# EAGLE board X15_Power_Plate (EAGLE 9.6.2)
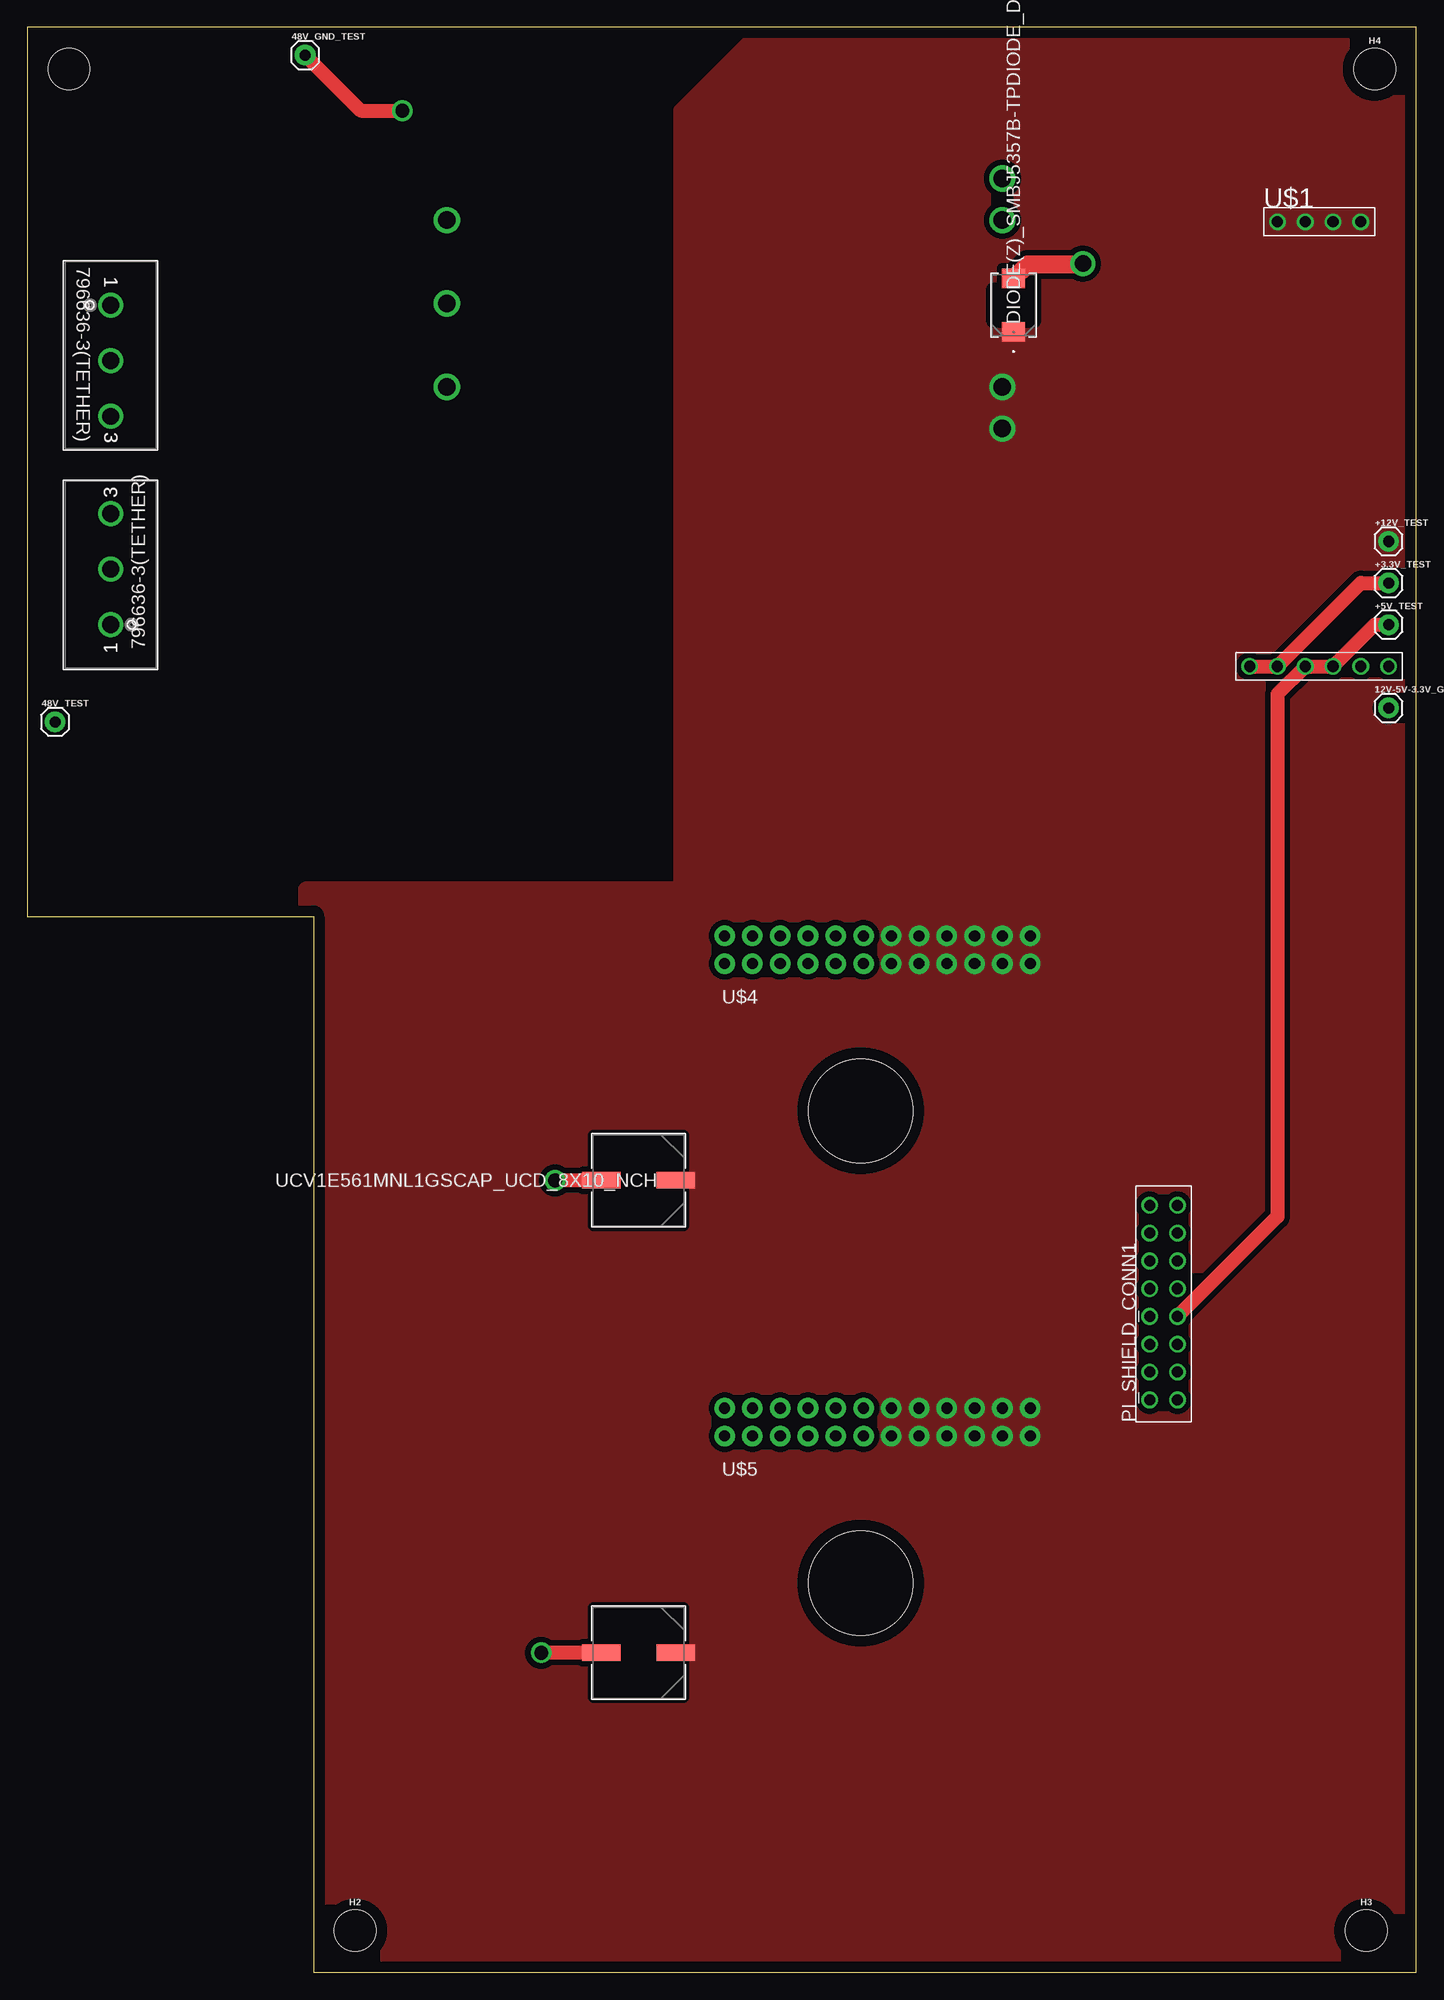
[diagram p0: board, top side]
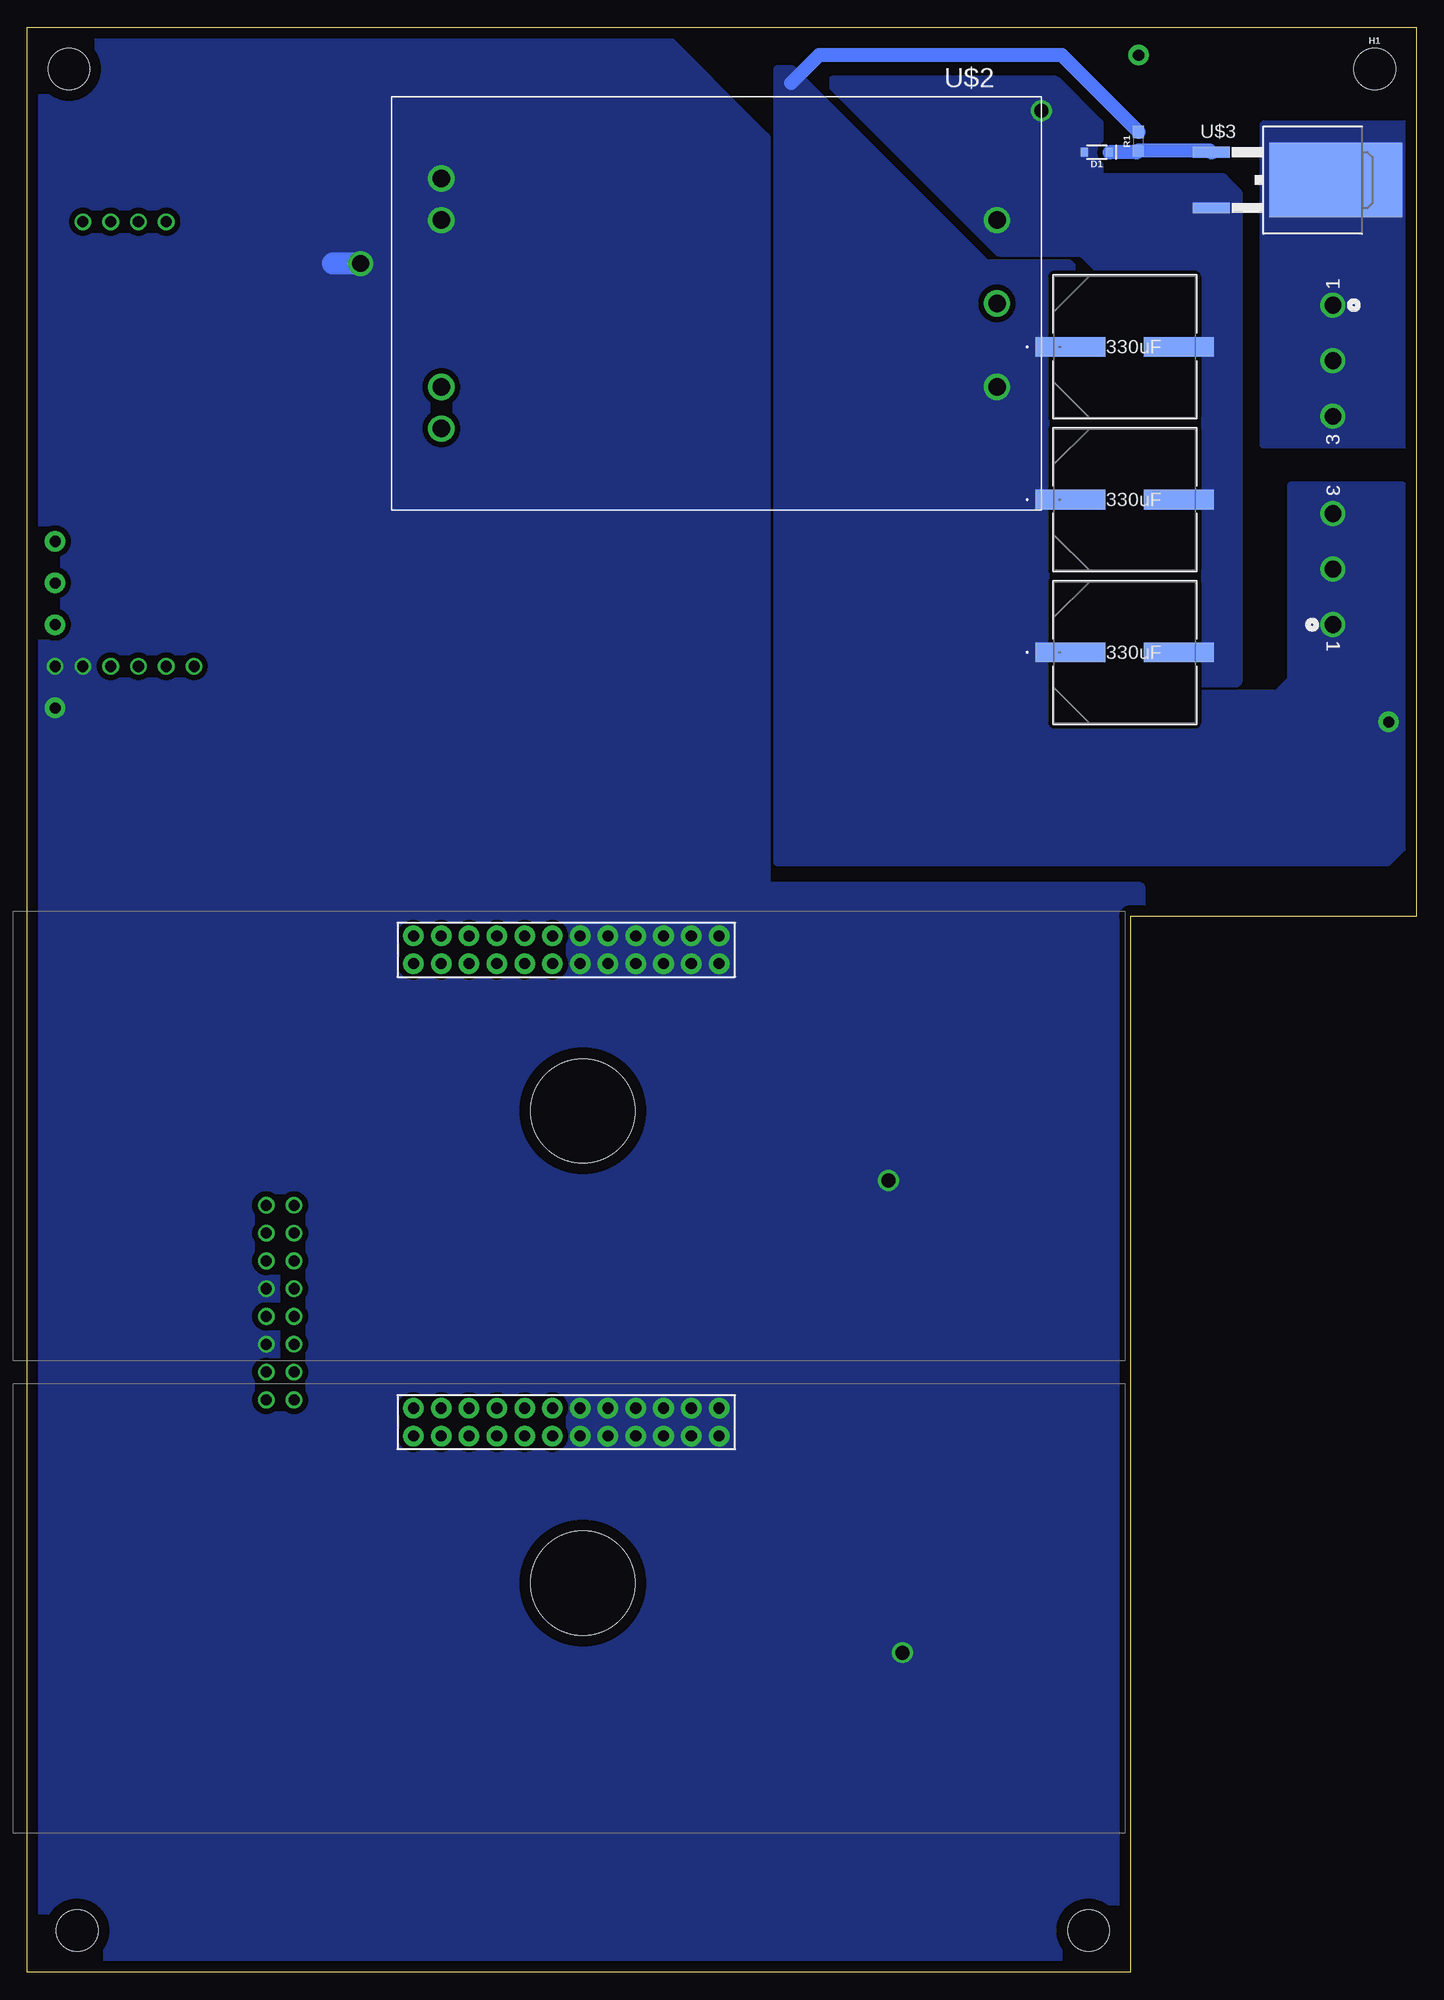
[diagram p1: board, bottom side, seen from below]

Size 127 x 177.8 mm. Coordinates in mm from the lower left corner, seen from the top.
Outline: 26.16,0 127,0 127,177.8 0,177.8 0,96.52 26.16,96.52 26.16,0
Copper layers (1*16): Top 0.035mm / dielectric 1.5mm / Bottom 0.035mm
Design rules "477": minimum track width 6mil, minimum drill 0.35mm, track to track 6mil, track to pad 6mil, pad to pad 6mil, via to via 6mil, smd to smd 6mil, copper to edge 40mil, drill to drill 6mil, minimum pad ring 10mil, minimum via ring 8mil, stop-mask expansion 4mil, vias tented up to drill 0mil, thermal gap 10mil
Holes 9.53 mm at 76.2,35.56 76.2,78.74

## Footprints (pad centres in the part's own frame; a part is rotated, then mirrored left to right if it is on the bottom)
1X01 = drill 1.016 pad 1.88: 1 0,0
CAP_099112E3_VIS-M = smd 6.401 x 1.803: 1 -4.966,0; 2 4.966,0
CAP_UCD_8X10_NCH = smd 3.505 x 1.499: 1 -3.404,0; 2 3.404,0
DIODE_DO-214AA_4P38X3P62_MCC-M = smd 1.803 x 2.108: 1 -2.451,0; 2 2.451,0
SOD-323 = smd 0.63 x 0.83: A 1.15,0; C -1.15,0
6-32-HOLE = hole 3.81: 0,0
IPL7X2 = drill 1.016 pad 1.524: 1 2.032,3.81; 2 2.032,1.27; 3 4.572,3.81; 4 4.572,1.27; 5 7.112,3.81; 6 7.112,1.27; 7 9.652,3.81; 8 9.652,1.27; 9 12.192,3.81; 10 12.192,1.27; 11 14.732,3.81; 12 14.732,1.27; 13 17.272,3.81; 14 17.272,1.27; 15 19.812,3.81; 16 19.812,1.27
0603 = smd 1.1 x 1: 1 -0.85,0; 2 0.85,0
CON3_P5MM_VER_TERM-BLK_TYC = drill 1.524 pad 2.032: 1 0,0; 2 5.08,0; 3 10.16,0
TSW-105-05-G-S(D-C) = drill 1.016: 1 -3.81,20.32; 2 -1.27,20.32; 3 1.27,20.32; 4 3.81,20.32; 5 -6.35,-20.32; 6 -3.81,-20.32; 7 -1.27,-20.32; 8 1.27,-20.32; 9 3.81,-20.32; 10 6.35,-20.32
BMR480_CONNECTOR = drill 1.6 pad 2: PIN1 4.06,26.52; PIN2 4.06,18.9; PIN3 4.06,11.28; PIN4 54.86,7.47; PIN5 54.86,11.28; PIN7 54.86,26.52; PIN8 54.86,30.33
D2PAK = smd 3.4 x 1: 1 -6.552,2.54; 2 -6.552,-2.54 | smd 12.14 x 6.8: 3 4.818,0
BACKPLANE_ESC_ADAPTER_BKP_PWR = drill 1.016 pad 1.88: 12V@1 65.024,36.322; 12V@2 65.024,38.862; 12V@3 62.484,36.322; 12V@4 62.484,38.862; 12V@5 59.944,36.322; 12V@6 59.944,38.862; 12V@7 57.404,36.322; 12V@8 57.404,38.862; 12V@9 54.864,36.322; 12V@10 54.864,38.862; 12V@11 52.324,36.322; 12V@12 52.324,38.862; GND@1 49.784,38.862; GND@2 49.784,36.322; GND@3 47.244,38.862; GND@4 47.244,36.322; GND@5 44.704,38.862; GND@6 44.704,36.322; GND@7 42.164,38.862; GND@8 42.164,36.322; GND@9 39.624,38.862; GND@10 39.624,36.322; GND@11 37.084,38.862; GND@12 37.084,36.322

## Placement (x,y rotation side)
12V-5V-3.3V_GND  [1X01]  124.46,115.57 0 top
48V_GND_TEST  [1X01]  25.4,175.26 0 top
48V_TEST  [1X01]  2.54,114.3 0 top
+3.3V_TEST  [1X01]  124.46,127 0 top
+5V_TEST  [1X01]  124.46,123.19 0 top
+12V_TEST  [1X01]  124.46,130.81 0 top
C1  330uF  [CAP_099112E3_VIS-M]  26.67,120.65 0 bottom
C2  330uF  [CAP_099112E3_VIS-M]  26.67,148.59 0 bottom
C3  330uF  [CAP_099112E3_VIS-M]  26.67,134.62 0 bottom
C4  UCV1E561MNL1GSCAP_UCD_8X10_NCH  [CAP_UCD_8X10_NCH]  55.88,72.39 180 top
C5  UCV1E561MNL1GSCAP_UCD_8X10_NCH  [CAP_UCD_8X10_NCH]  55.88,29.21 180 top
CR1  DIODE(Z)_SMBJ5357B-TPDIODE_DO-214AA_4P38X3P62_MCC-M  [DIODE_DO-214AA_4P38X3P62_MCC-M]  90.17,152.4 90 top
D1  DIODE-ZENERPZU15B3A,115  [SOD-323]  29.21,166.37 180 bottom
H1  6-32-HOLE  [6-32-HOLE]  3.81,173.99 0 bottom
H2  6-32-HOLE  [6-32-HOLE]  29.97,3.81 0 top
H3  6-32-HOLE  [6-32-HOLE]  122.43,3.81 0 top
H4  6-32-HOLE  [6-32-HOLE]  123.19,173.99 0 top
PI_SHIELD_CONN1  8X_CONN  [IPL7X2]  106.43,50.29 90 top
R1  1M  [0603]  25.4,167.39 90 bottom
TETHER_48V  796636-3(TETHER)  [CON3_P5MM_VER_TERM-BLK_TYC]  7.62,123.19 90 top
TETHER_GND  796636-3(TETHER)  [CON3_P5MM_VER_TERM-BLK_TYC]  7.62,152.4 270 top
U$1  CONN_DISTRIBUTION_TO_CONVERSION  [TSW-105-05-G-S(D-C)]  118.11,139.7 0 top
U$2  CONN_BMR480_CONNECTOR  [BMR480_CONNECTOR]  34.29,171.45 180 bottom
U$3  TRANS_IRF1018ESTRLPBF  [D2PAK]  12.19,163.83 0 bottom
U$4  BACKPLANE_ESC_ADAPTER_PWRBKP  [BACKPLANE_ESC_ADAPTER_BKP_PWR]  26.67,55.88 0 top
U$5  BACKPLANE_ESC_ADAPTER_PWRBKP  [BACKPLANE_ESC_ADAPTER_BKP_PWR]  26.67,12.7 0 top

## Library data of the parts
12V-5V-3.3V_GND 48V_GND_TEST 48V_TEST +3.3V_TEST +5V_TEST +12V_TEST = SparkFun-Connectors
C1-C3 = X15_Brickstribution; COPYRIGHT: Copyright (C) 2022 Ultra Librarian. All rights reserved.; MANUFACTURER_PART_NUMBER: MAL215099112E3; MFR_NAME: Vishay
C4 C5 = 2023-01-03_19-29-37_Library; COPYRIGHT: Copyright (C) 2023 Ultra Librarian. All rights reserved.; DIGI-KEY_PART_NUMBER_1: 493-14353-1-ND; DIGI-KEY_PART_NUMBER_2: 493-14353-2-ND; DIGI-KEY_PART_NUMBER_3: 493-14353-6-ND; MANUFACTURER_PART_NUMBER: UCV1E561MNL1GS; MFR_NAME: Nichicon
CR1 = X15_Brickstribution; COPYRIGHT: Copyright (C) 2022 Ultra Librarian. All rights reserved.; MANUFACTURER_PART_NUMBER: SMBJ5357B-TP; MFR_NAME: MCC
D1 = SparkFun-DiscreteSemi; ZENER_VOLTAGE: 15V
H1-H4 U$1-U$3 = X15_Brickstribution
PI_SHIELD_CONN1 U$4 U$5 = X15-Backplane Parts
R1 = SparkFun-Resistors; PROD_ID: RES-07868
TETHER_48V TETHER_GND = X15_Brickstribution; COPYRIGHT: Copyright (C) 2022 Ultra Librarian. All rights reserved.; DIGI-KEY_PART_NUMBER_1: A98423-ND; MANUFACTURER_PART_NUMBER: 796636-3; MFR_NAME: TE Connectivity

## Nets
12V_GND: 12V-5V-3.3V_GND.1 C4.2 C5.2 CR1.2 PI_SHIELD_CONN1.6 PI_SHIELD_CONN1.10 U$1.9 U$1.10 U$2.PIN4 U$2.PIN5 U$4.GND@1 U$4.GND@2 U$4.GND@3 U$4.GND@4 U$4.GND@5 U$4.GND@6 U$4.GND@7 U$4.GND@8 U$4.GND@9 U$4.GND@10 U$4.GND@11 U$4.GND@12 U$5.GND@1 U$5.GND@2 U$5.GND@3 U$5.GND@4 U$5.GND@5 U$5.GND@6 U$5.GND@7 U$5.GND@8 U$5.GND@9 U$5.GND@10 U$5.GND@11 U$5.GND@12
48V_GND: 48V_GND_TEST.1 C1.2 C2.2 C3.2 D1.A U$2.PIN3 U$3.2
+3.3V: +3.3V_TEST.1 U$1.5 U$1.6
+5V: +5V_TEST.1 PI_SHIELD_CONN1.8 U$1.7 U$1.8
+12V: +12V_TEST.1 C4.1 C5.1 CR1.1 U$1.1 U$1.2 U$1.3 U$1.4 U$2.PIN7 U$2.PIN8 U$4.12V@1 U$4.12V@2 U$4.12V@3 U$4.12V@4 U$4.12V@5 U$4.12V@6 U$4.12V@7 U$4.12V@8 U$4.12V@9 U$4.12V@10 U$4.12V@11 U$4.12V@12 U$5.12V@1 U$5.12V@2 U$5.12V@3 U$5.12V@4 U$5.12V@5 U$5.12V@6 U$5.12V@7 U$5.12V@8 U$5.12V@9 U$5.12V@10 U$5.12V@11 U$5.12V@12
+48V: 48V_TEST.1 C1.1 C2.1 C3.1 R1.2 TETHER_48V.1 TETHER_48V.2 TETHER_48V.3 U$2.PIN1
GND_RAW: TETHER_GND.1 TETHER_GND.2 TETHER_GND.3 U$3.3
REV_GATE: D1.C R1.1 U$3.1

## Tracks (layer width: path | path; a pad name or v marks a point on that pad's centre or on a via)
12V_GND  (via drill 1.27, 1.52)
  Top 1.27: C4.2 v48.26,72.39 | C5.2 v46.99,29.21
  Top 1.651: 96.43,156.12 91.44,156.12 CR1.2
  Top 2.032: v96.52,156.21 96.43,156.12
  Bottom 2.032: v96.52,156.21 99.06,156.21
  pour Bottom (isolate 0.508, no thermals): 59.69,167.64 59.69,99.06 25.4,99.06 25.4,1.27 127,1.27 127,177.8 69.85,177.8
48V_GND  (via drill 1.27)
  Top 1.27: 48V_GND_TEST.1 30.48,170.18 v34.29,170.18
  pour Bottom (isolate 0.508, no thermals): 16.51,118.11 16.51,162.56 17.78,163.83 29.21,163.83 29.21,168.91 33.02,172.72 53.34,172.72 38.1,157.48 30.48,157.48 25.4,152.4 25.4,120.65 22.86,118.11
+3.3V
  Top 1.27: U$1.5 U$1.6 121.92,127 +3.3V_TEST.1
+5V
  Top 1.27: +5V_TEST.1 123.19,123.19 U$1.8 U$1.7 114.3,116.84 114.3,69.09 PI_SHIELD_CONN1.8
+12V
  pour Top (isolate 0.508, rank 2, no thermals): 59.69,170.18 59.69,99.06 25.4,99.06 25.4,1.27 127,1.27 127,177.8 67.31,177.8
+48V
  Bottom 1.27: R1.2 32.42,175.26 54.61,175.26 57.15,172.72
  pour Bottom (isolate 0.508, no thermals): 1.27,135.89 1.27,102.87 2.66,101.48 58.42,101.48 58.42,173.99 57.15,173.99 39.37,156.21 31.75,156.21 26.67,151.13 26.67,119.38 24.13,116.84 12.7,116.84 11.43,118.11 11.43,135.89
GND_RAW
  pour Bottom (isolate 0.508, no thermals): 0,168.91 0,139.7 13.97,139.7 13.97,168.91
REV_GATE
  Bottom 1.27: U$3.1 18.91,166.54 R1.1 25.57,166.37 D1.C